# Altium PCB filtro_rev4.PcbDoc
Units mil, origin at the board's own origin, x right, y up, seen from the top; angles counter-clockwise.
Board outline 3939.96 x 3929 mil, 2 copper layers (Top Layer, Bottom Layer); 21 components, 15 nets, 76 pads, 513 vias.
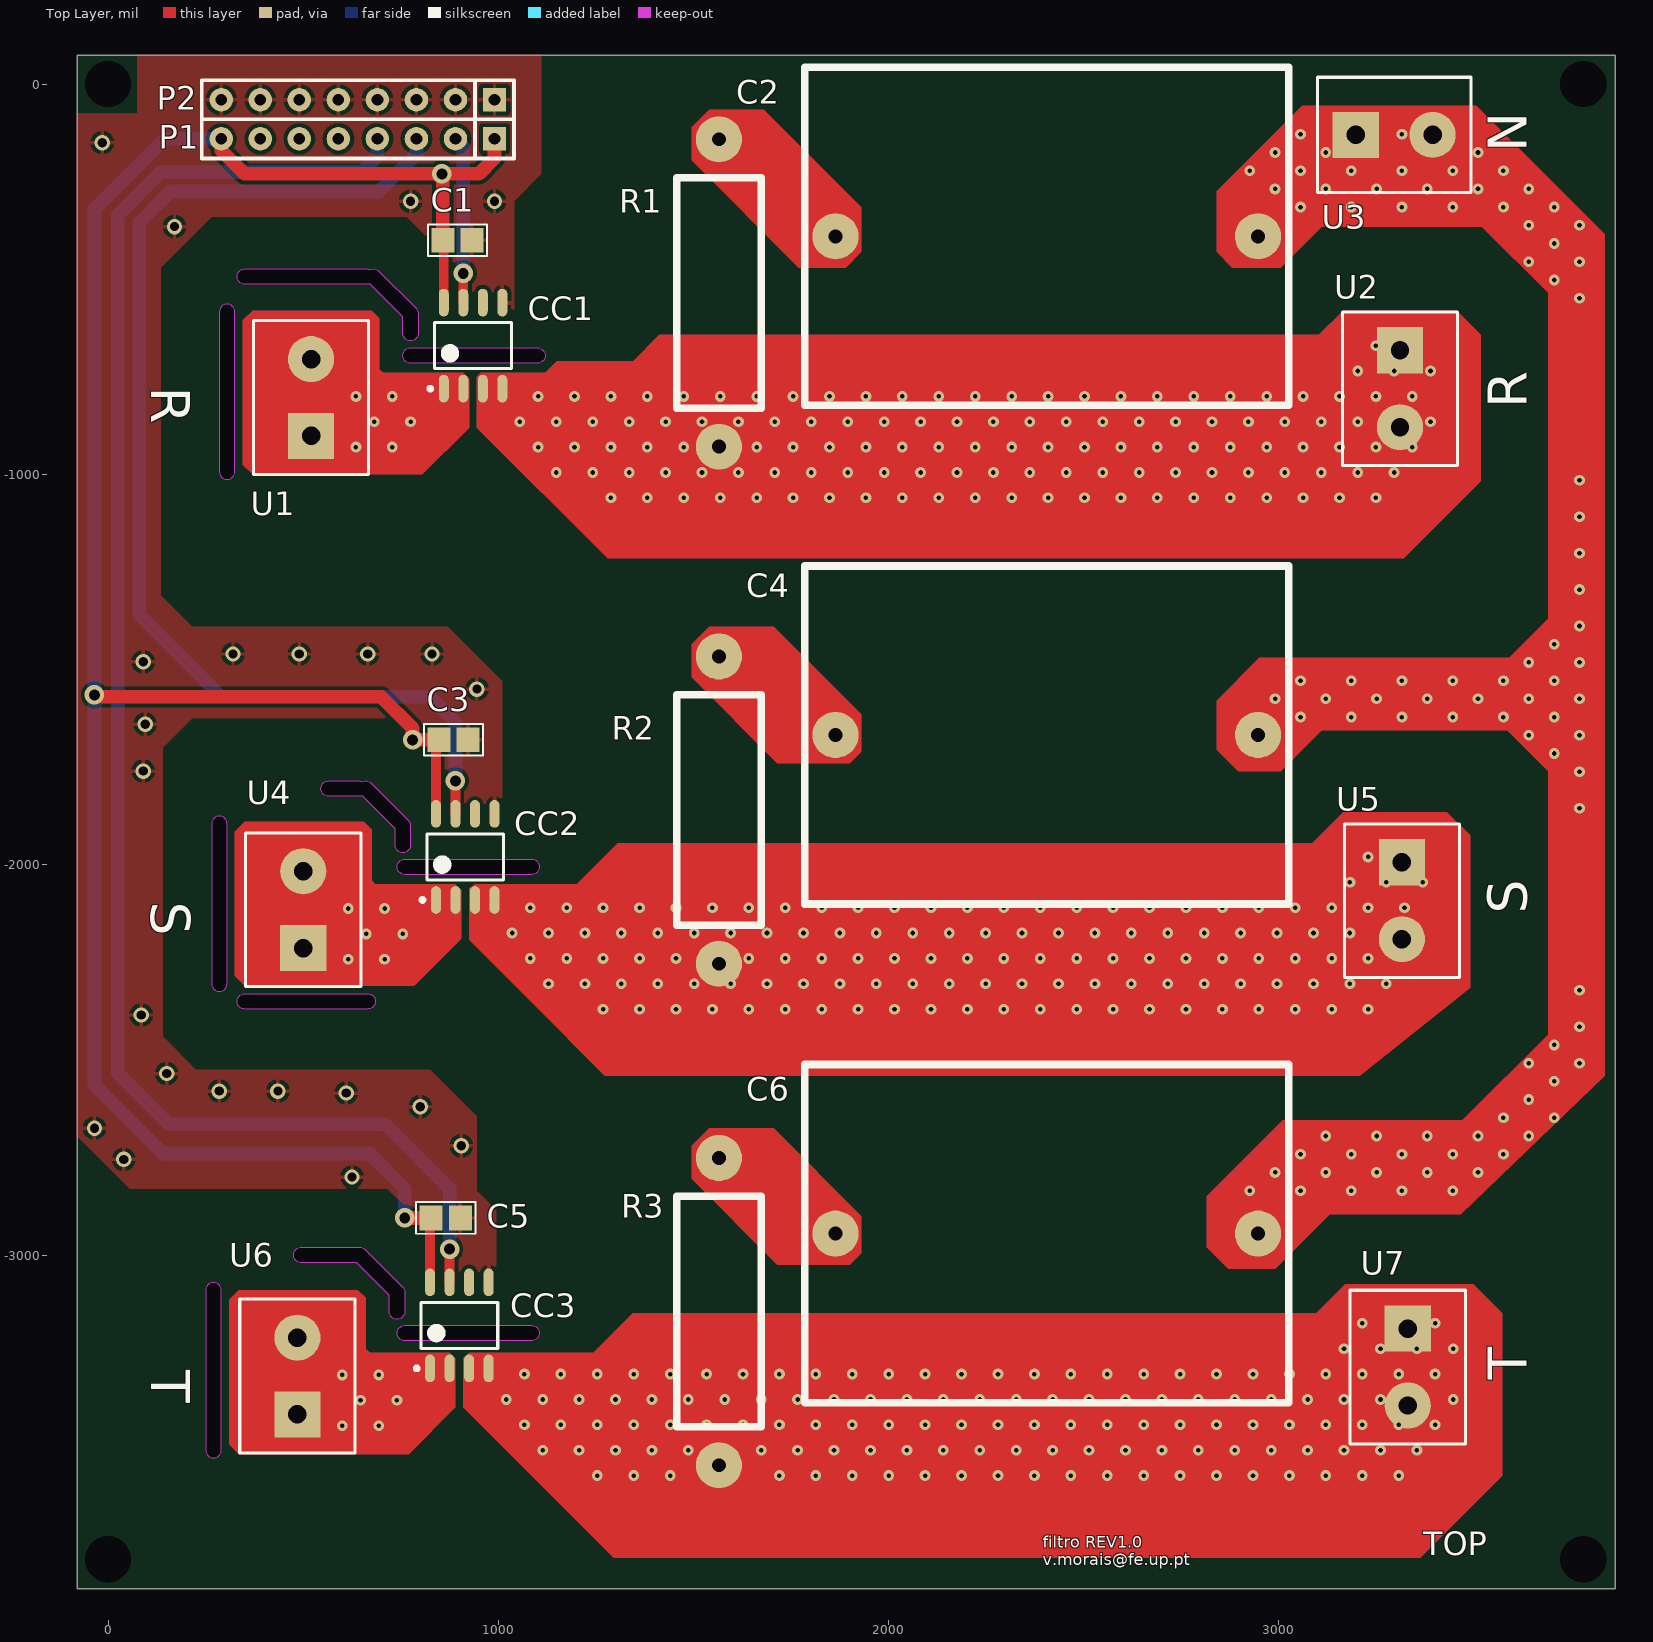
[diagram p0: Top Layer view]
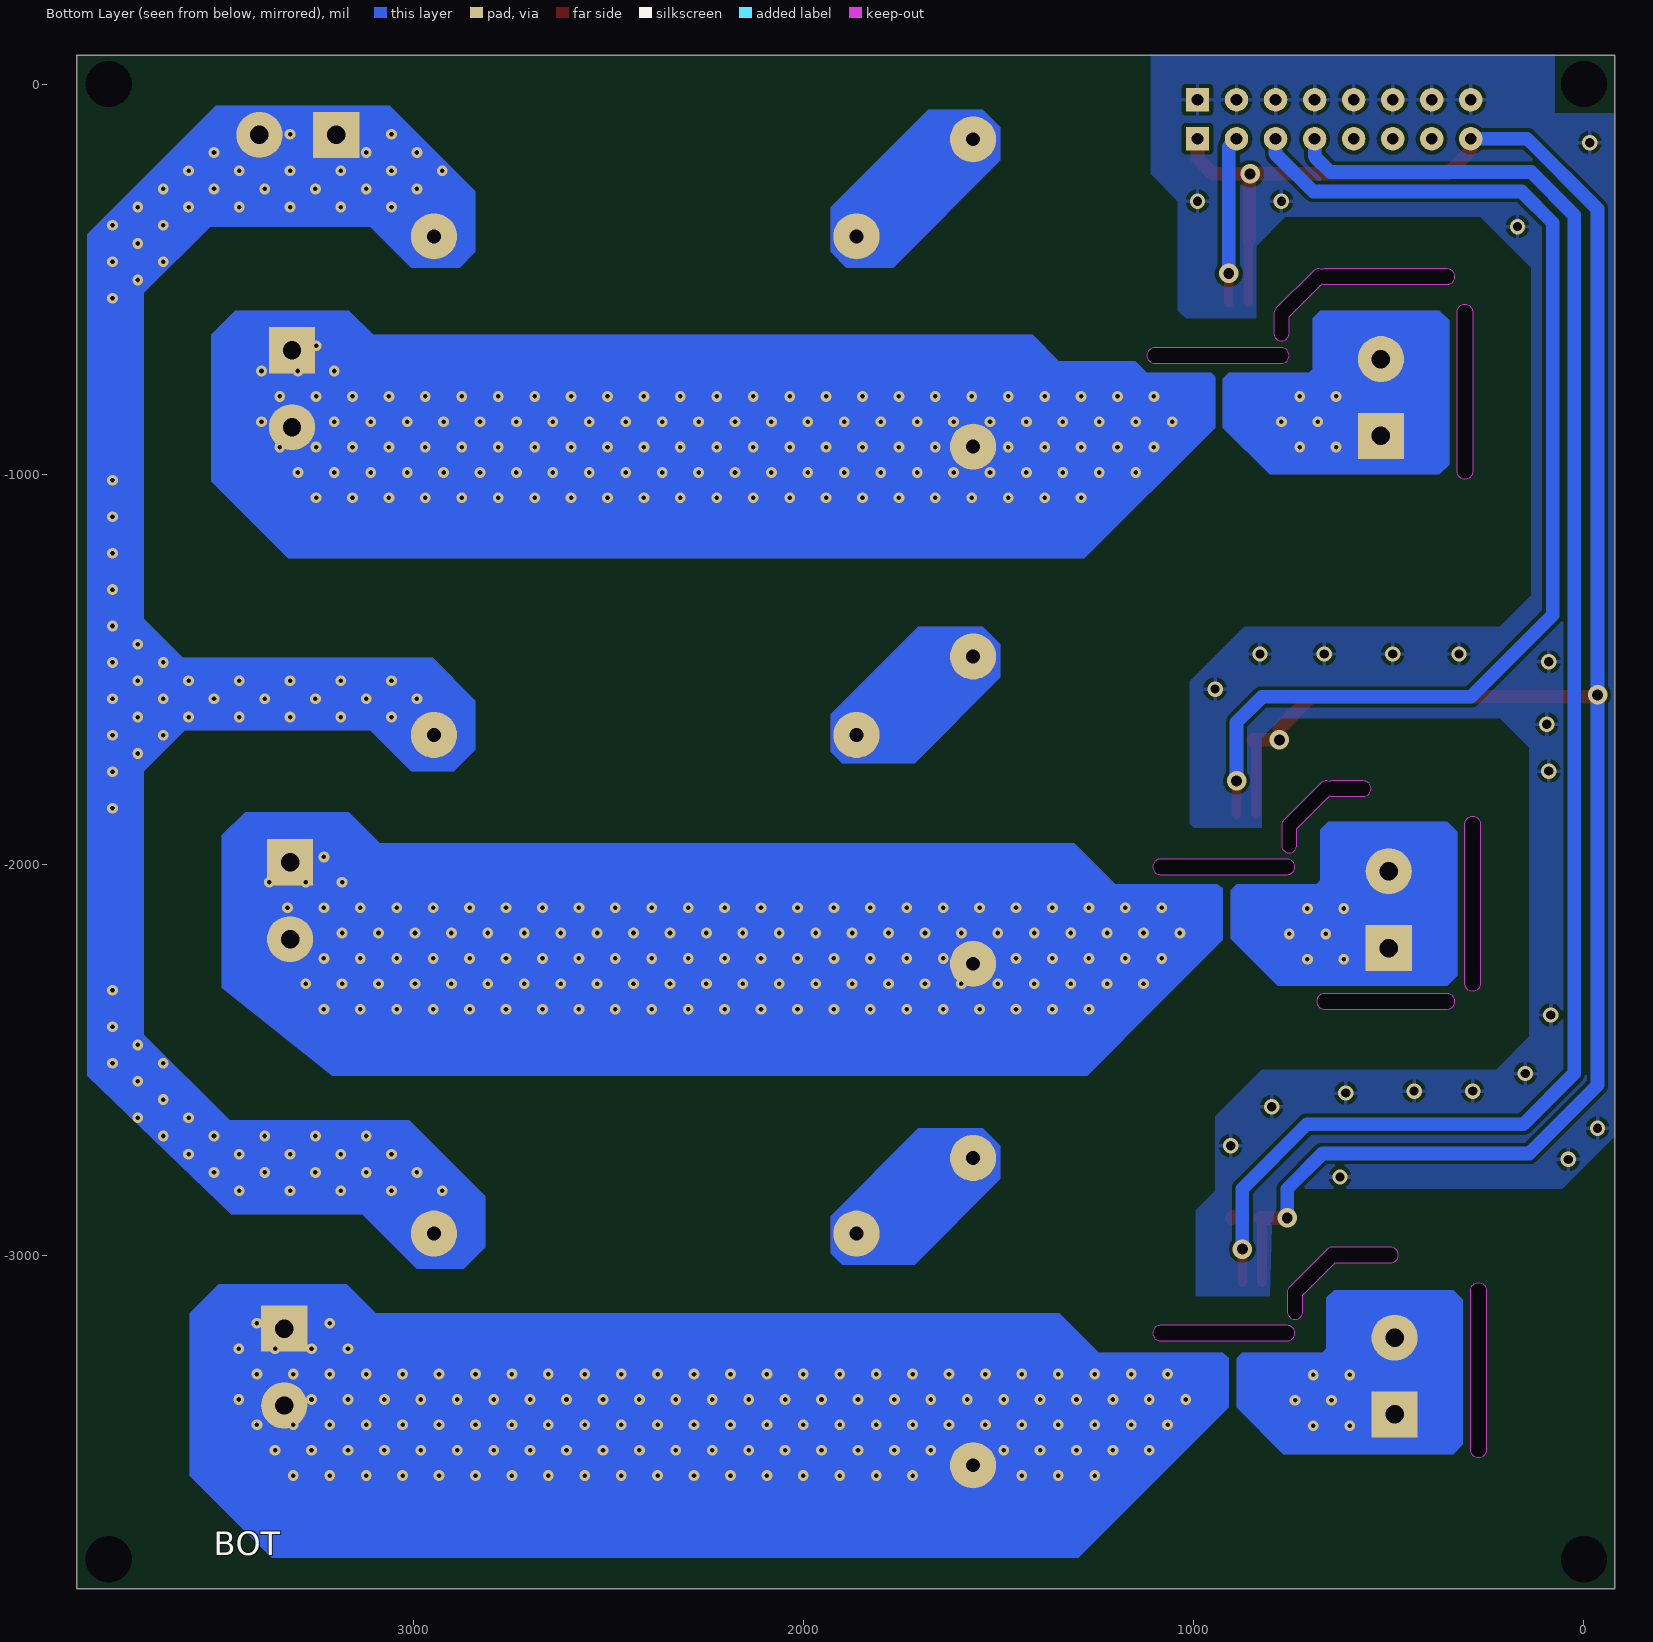
[diagram p1: Bottom Layer view, seen from below]

## Layer stack, top to bottom
Top Solder: solder mask 0.4, Solder Resist, Dk 3.5
Top Layer: signal copper 1.4
Dielectric 1: dielectric 12.6, FR-4, Dk 4.8
Bottom Layer: signal copper 1.4
Bottom Solder: solder mask 0.4, Solder Resist, Dk 3.5

## Board outline
-78.74,-3854.53 3861.22,-3854.53 3861.22,74.47 -78.74,74.47
cut-out: 495,-3019.7 cw(c495,-3000) 495,-2980.3 645,-2980.3 cw(c645,-3000) 658.93,-2986.07 658.92,-2986.06 cw(c645,-3000) 658.94,-2986.08 658.92,-2986.06 753.94,-3081.08 ccw(c740,-3095) 753.92,-3081.06 753.93,-3081.07 cw(c740,-3095) 759.7,-3095 759.7,-3145 cw(c740,-3145) 720.3,-3145 720.3,-3103.16 636.84,-3019.7
cut-out: 350,-2369.7 cw(c350,-2350) 350,-2330.3 665,-2330.3 cw(c665,-2350) 684.7,-2350 cw(c665,-2350) 665,-2369.7
cut-out: 565,-1824.7 cw(c565,-1805) 565,-1785.3 645,-1785.3 cw(c645,-1805) 652.5,-1786.78 cw(c660,-1805) 673.93,-1791.07 768.94,-1886.08 ccw(c755,-1900) 768.92,-1886.06 768.93,-1886.07 cw(c755,-1900) 774.7,-1900 774.7,-1950 cw(c755,-1950) 735.3,-1950 735.3,-1908.16 650.93,-1823.79 cw(c645,-1805) 645,-1824.7
cut-out: 350,-512.85 cw(c350,-493.15) 350,-473.45 665,-473.45 cw(c665,-493.15) 672.5,-474.93 cw(c680,-493.15) 693.93,-479.22 788.94,-574.23 ccw(c775,-588.15) 788.92,-574.21 788.93,-574.22 cw(c775,-588.15) 794.7,-588.15 794.7,-638.15 cw(c775,-638.15) 755.3,-638.15 755.3,-596.31 670.93,-511.94 cw(c665,-493.15) 665,-512.85
cut-out: 250.3,-3500 ccw(c270,-3500) 289.7,-3500 289.7,-3090 ccw(c270,-3090) 250.3,-3090
cut-out: 285.3,-993.15 ccw(c305,-993.15) 324.7,-993.15 324.7,-583.15 ccw(c305,-583.15) 285.3,-583.15
cut-out: 265.3,-2305 ccw(c285,-2305) 304.7,-2305 304.7,-1895 ccw(c285,-1895) 265.3,-1895
cut-out: 775,-715 cw(c775,-695.3) 775,-675.6 1100,-675.6 cw(c1100,-695.3) 1119.7,-695.3 cw(c1100,-695.3) 1100,-715
cut-out: 760,-2025 cw(c760,-2005.3) 760,-1985.6 1085,-1985.6 cw(c1085,-2005.3) 1104.7,-2005.3 cw(c1085,-2005.3) 1085,-2025
cut-out: 760,-3219.7 cw(c760,-3200) 760,-3180.3 1085,-3180.3 cw(c1085,-3200) 1104.7,-3200 cw(c1085,-3200) 1085,-3219.7

## Design rules (kind name [scope] priority, off if disabled: settings)
Clearance [All] p1: gap=10 ignorepadtopadclearanceinfootprint=FALSE
Height [All] p1: minheight=0 maxheight=10000 prefheight=500
HoleSize [All] p1: absolutevalues=TRUE maxlimit=1000 minlimit=1 maxpercent=80.000 minpercent=20.000
PlaneClearance [All] p1: clearance=100
PolygonConnect [All] p1: connectstyle=Relief reliefconductorwidth=10 reliefentries=4 polygonreliefangle="90 Angle" airgapwidth=10
RoutingVias [All] p1: holewidth=28 width=50 viastyle="Through Hole" minholewidth=28 minwidth=50 maxholewidth=28 maxwidth=50
SilkToSilkClearance [All] p1: silktosilkclearance=1
SilkToSolderMaskClearance [IsPad] p1: minsilkscreentomaskgap=1 clearancetoexposedcopper=TRUE
SolderMaskExpansion [All] p1: expansion=4
Width [All] p1: maxlimit=150 minlimit=10 preferedwidth=30
25 further rules are at their usual default settings.

## Components (designator, comment, footprint, x,y, rotation, side; value= is the part's Value field where it differs from the comment)
C1 "C 10uF 0805 MLCC 25V X5R" CAPC_0805 895,-400 r180 top
C2 "C 8uF PPCap TH 900V" PWR_CAP_PP_8u 2405,-390 r180 top
C3 "C 10uF 0805 MLCC 25V X5R" CAPC_0805 885,-1680 r180 top
C4 "C 2uF PPCap TH 630V" PWR_CAP_PP_8u 2405,-1667.5 r180 top
C5 "C 10uF 0805 MLCC 25V X5R" CAPC_0805 865,-2905 r180 top
C6 "C 2uF PPCap TH 630V" PWR_CAP_PP_8u 2405,-2945 r180 top
CC1 "IC CC 30A SO-8" CC6303_SOP8 935,-670 r90 top
CC2 "IC CC 30A SO-8" CC6303_SOP8 915,-1980 r90 top
CC3 "IC CC 30A SO-8" CC6303_SOP8 900,-3180.24 r90 top
P1 "P 8p 2.54 SR DW 8P" "Header 8x1 8.5mm" 990,-140 r180 top
P2 "P 8p 2.54 SR DW 8P" "Header 8x1 8.5mm" 990,-40 r180 top
R1 "R 2.2 3W TH 5%" PWR_RESC_3W 1565,-535 r270 top
R2 "R 2.2 3W TH 5%" PWR_RESC_3W 1565,-1860 r270 top
R3 "R 2.2 3W TH 5%" PWR_RESC_3W 1565,-3145 r270 top
U1 "P 2p 5mm" connector1x2_parafuso 520,-802.87 r90 top
U2 "P 2p 5mm" connector1x2_parafuso 3310,-780.28 r270 top
U3 "P 2p 5mm" connector1x2_parafuso 3295,-130 r0 top
U4 "P 2p 5mm" connector1x2_parafuso 500,-2115 r90 top
U5 "P 2p 5mm" connector1x2_parafuso 3315,-2092.13 r270 top
U6 "P 2p 5mm" connector1x2_parafuso 485,-3310 r90 top
U7 "P 2p 5mm" connector1x2_parafuso 3330,-3287.13 r270 top

## Footprints (in the part's own frame and the unit in brackets; to place one, negate y for a bottom-side part, rotate by r counter-clockwise, add the part's x,y. Pads: shape width x height; smd on the part's side, far side on the other; paste and mask are expansions set on the pad)
CAPC_0805 [mm] "Chip Capacitor, Body 2.0x1.3mm, IPC Low Density"
  rect 1.5x1.6 smd: 1(-0.95,0) 2(0.95,0)
  silkscreen extent -1.93,-1.03 1.93,1.03, body extent -1.1,-0.72 1.1,0.72, height 1.1
CC6303_SOP8 [mm] "SOP, 8-Leads, Body 4,90x3,91mm, Pitch 1,27mm, IPC Medium Density"
  oval 1.8x0.65 smd: 1(-2.8,1.905) 2(-2.8,0.635) 3(-2.8,-0.635) 4(-2.8,-1.905) 5(2.8,-1.905) 6(2.8,-0.635) 7(2.8,0.635) 8(2.8,1.905)
  silkscreen extent -2.92,-2.5 1.5,2.9, body extent -1.9,-2.5 1.9,2.5, height 2.65
connector1x2_parafuso [mm] "Connector; Header; 2 Position"
  rect 3x3 hole 1.2: 1(-2.5,0)
  round 3 hole 1.2: 2(2.5,0)
  silkscreen extent -5,-3.75 5,3.75, body extent -4.92,-4.53 5.68,4.47, height 14.6
"Header 8x1 8.5mm" [mil] "Stackable 8 pin header"
  rect 60x60 hole 30: 1(0,0)
  round 60 hole 30: 2(100,0) 3(200,0) 4(300,0) 5(400,0) 6(500,0) 7(600,0) 8(700,0)
  silkscreen extent -50,-50 750,50, body extent -50,-50 750,50, height 335
PWR_CAP_PP_8u [mm] "8uCAP"
  round 3 hole 0.9: 1(-13.75,0) 2(13.75,0)
  silkscreen extent -15.75,-11 15.75,11, body extent -15.73,-10.97 15.74,10.97, height 37
PWR_RESC_3W [mm] "RESC_3W"
  round 3 hole 0.9: 1(-10,0) 2(10,0)
  silkscreen extent -7.5,-2.75 7.5,2.75, body extent -10.79,-2.57 10.8,2.93, height 13.75

## Part data
C1 C3 C5: library part "Capacitor SMD", "Capacitores de cerâmica multicamada MLCC - SMD/SMT 10uF 25V X5R +/-10% 0805 Gen Purp", LCSC PART #=C15850, Mouser VPN=963-TMK212BBJ106KG-T, Price=0,162
C2: library part CAPACITOR_dcbus, "Condensador de polipropileno PP KEMET, 8µF, ±5%, 900V dc, Montaje en orificio pasante", Price=4,83, RS VPN=137-2363
C4 C6: library part CAPACITOR_dcbus, "Capacitores de película 2.0uF 630volts 10% 37.5mmL/S 1.0mmL/D", Mouser VPN=871-B32676E6205K, Price=3,62
CC1 CC2 CC3: library part Current_Sensor_cc6303, "Sensores de Corrente de Montagem de Painel Hall Effect IC LF 30A 66 mV/A", LCSC PART #=C10681, Mouser VPN=630-ACHS-7123-000E, Price=3,47
P1 P2: library part jumper_8p, "Distribuidores e Alojamento de Fios CGrid Hrd SRDW THo le 8ckt", Mouser VPN=538-87937-0800, Price=0,621
R1 R2 R3: library part Resistor, "Resistencia TE Connectivity, de 2.2O ±5%, 3W, Serie ROX3S", Price=0,351, RS VPN=214-2409
U1 U2 U3 U4 U5 U6 U7: library part gen_purpose_conn_1x2, "Bloques de terminales de PCB de perfil estándar RS de 5,0 mm", Price=0,24, RS VPN=896-6696

## Free pads (board coordinates)
  round 60 hole 118.11 unplated: 4(0,-3779.53) 4(0,0) 4(3779.53,0) 4(3779.53,-3779.53)

## Via types
v1: diameter 27.56, hole 11.81, Top Layer to Bottom Layer, 484 vias
v2: diameter 39.37, hole 23.62, Top Layer to Bottom Layer, 22 vias
v3: diameter 50, hole 28, Top Layer to Bottom Layer, 7 vias

## Nets (pads, with @x,y where several pads share a name; then routed paths per layer and width w, separated by ;. In a path a pad name is that pad's centre, name@x,y a point inside that pad or via, vN(x,y) a via of type N, cw(c..) or ccw(c..) an arc to the next point about the centre after c; other vN are vias at no path point)
5gnd1: C1.1 C3.1 C5.1 CC1.5 CC2.5 CC3.5 P2.1 P2.2 P2.3 P2.4 P2.5 P2.6 P2.7 P2.8 | length 3.4
  Top Layer w35: C5.1@900,-2902.6 C5.1
  other v2: 625,-2800 40,-2755 905,-2720 -35,-2675 800,-2620 610,-2585 285,-2580 435,-2580 150,-2535 85,-2385 90,-1760 95,-1640 945,-1550 90,-1480 320,-1460 490,-1460 665,-1460 830,-1460 170,-365 775,-300 990,-300 -15,-150
5VDC1: C1.2 C3.2 C5.2 CC1.8 CC2.8 CC3.8 P1.1 P1.8 | length 6149.8
  Top Layer w25: CC3.8 825,-2907.6 C5.2 ; C3.2@837.6,-1680 840,-1682.4 CC2.8 ; C1.2 860,-402.4 CC1.8
  Top Layer w35: v3(-35,-1565) -30,-1570 700,-1570 780,-1650 v3(780,-1680) C3.2 ; P1.8 290,-170 350,-230 v3(855,-230) ; v3(760,-2905) C5.2 ; C1.2 857.6,-232.6 v3(855,-230) ; P1.1 990,-190 950,-230 v3(855,-230)
  Bottom Layer w35: P1.8 145,-140 -35,-320 v3(-35,-1565) -35,-2565 140,-2740 670,-2740 760,-2830 v3(760,-2905)
GRID_N: C2.1 C4.1 C6.1 U3.1 U3.2
  other v1: 2925,-2835 3055,-2835 3185,-2835 3315,-2835 3445,-2835 2990,-2788.33 3120,-2788.33 3250,-2788.33 3380,-2788.33 3510,-2788.33 3055,-2741.66 3185,-2741.66 3315,-2741.66 3445,-2741.66 3575,-2741.66 3120,-2695 3250,-2695 3380,-2695 3510,-2695 3640,-2695 3575,-2648.33 3705,-2648.33 3640,-2601.66 3705,-2555 3640,-2508.33 3770,-2508.33 3705,-2461.66 3770,-2415 3770,-2321.66 3770,-1855 3770,-1761.66 3705,-1715 3640,-1668.33 3770,-1668.33 3055,-1621.66 3185,-1621.66 3315,-1621.66 3445,-1621.66 3575,-1621.66 3705,-1621.66 2990,-1575 3120,-1575 3250,-1575 3380,-1575 3510,-1575 3640,-1575 3770,-1575 3055,-1528.33 3185,-1528.33 3315,-1528.33 3445,-1528.33 3575,-1528.33 3705,-1528.33 3640,-1481.67 3770,-1481.67 3705,-1435 3770,-1388.33 3770,-1295 3770,-1201.67 3770,-1108.33 3770,-1015 3770,-548.33 3705,-501.67 3640,-455 3770,-455 3705,-408.33 3640,-361.67 3770,-361.67 3055,-315 3185,-315 3315,-315 3445,-315 3575,-315 3705,-315 2990,-268.33 3120,-268.33 3250,-268.33 3380,-268.33 3510,-268.33 3640,-268.33 2925,-221.67 3055,-221.67 3185,-221.67 3315,-221.67 3445,-221.67 3575,-221.67 2990,-175 3120,-175 3510,-175 3055,-128.33 3315,-128.33
I_U: CC1.7 P1.2 | length 428
  Top Layer w25: CC1.7 v3(910,-485)
  Bottom Layer w35: P1.2 910,-160 v3(910,-485)
I_V: CC2.7 P1.3 | length 2985.4
  Top Layer w25: CC2.7 v3(890,-1785)
  Bottom Layer w35: P1.3 790,-178.64 693.64,-275 160,-275 80,-355 80,-1360 290,-1570 825,-1570 890,-1635 v3(890,-1785)
I_W: CC3.7 P1.4 | length 4184.4
  Top Layer w25: CC3.7 v3(875,-2985)
  Bottom Layer w35: P1.4 690,-185 650,-225 135,-225 25,-335 25,-2535 155,-2665 710,-2665 875.1,-2830.1 875.1,-2984.9 v3(875,-2985)
INDUCTOR_Ph_A: CC1.1 CC1.2 U1.1 U1.2
  other v1: 635,-930 728.33,-930 681.67,-865 775,-865 635,-800 728.33,-800
INDUCTOR_Ph_B: CC2.1 CC2.2 U4.1 U4.2
  other v1: 615,-2242.13 708.33,-2242.13 661.67,-2177.13 755,-2177.13 615,-2112.13 708.33,-2112.13
INDUCTOR_Ph_C: CC3.1 CC3.2 U6.1 U6.2
  other v1: 600,-3437.13 693.33,-3437.13 646.67,-3372.13 740,-3372.13 600,-3307.13 693.33,-3307.13
NetC2_2: C2.2 R1.1
NetC4_2: C4.2 R2.1
NetC6_2: C6.2 R3.1
NetCC1_3: CC1.3 CC1.4 R1.2 U2.1 U2.2
  other v1: 1288.33,-1060 1381.67,-1060 1475,-1060 1568.33,-1060 1661.67,-1060 1755,-1060 1848.33,-1060 1941.67,-1060 2035,-1060 2128.33,-1060 2221.66,-1060 2315,-1060 2408.33,-1060 2501.66,-1060 2595,-1060 2688.33,-1060 2781.66,-1060 2875,-1060 2968.33,-1060 3061.66,-1060 3155,-1060 3248.33,-1060 1148.33,-995 1241.67,-995 1335,-995 1428.33,-995 1521.67,-995 1615,-995 1708.33,-995 1801.67,-995 1895,-995 1988.33,-995 2081.67,-995 2175,-995 2268.33,-995 2361.66,-995 2455,-995 2548.33,-995 2641.66,-995 2735,-995 2828.33,-995 2921.66,-995 3015,-995 3108.33,-995 3201.66,-995 3295,-995 1101.67,-930 1195,-930 1288.33,-930 1381.67,-930 1475,-930 1661.67,-930 1755,-930 1848.33,-930 1941.67,-930 2035,-930 2128.33,-930 2221.66,-930 2315,-930 2408.33,-930 2501.66,-930 2595,-930 2688.33,-930 2781.66,-930 2875,-930 2968.33,-930 3061.66,-930 3155,-930 3248.33,-930 3341.66,-930 1055,-865 1148.33,-865 1241.67,-865 1335,-865 1428.33,-865 1521.67,-865 1615,-865 1708.33,-865 1801.67,-865 1895,-865 1988.33,-865 2081.67,-865 2175,-865 2268.33,-865 2361.66,-865 2455,-865 2548.33,-865 2641.66,-865 2735,-865 2828.33,-865 2921.66,-865 3015,-865 3108.33,-865 3201.66,-865 3388.33,-865 1101.67,-800 1195,-800 1288.33,-800 1381.67,-800 1475,-800 1568.33,-800 1661.67,-800 1755,-800 1848.33,-800 1941.67,-800 2035,-800 2128.33,-800 2221.66,-800 2315,-800 2408.33,-800 2501.66,-800 2595,-800 2688.33,-800 2781.66,-800 2875,-800 2968.33,-800 3061.66,-800 3155,-800 3248.33,-800 3341.66,-800 3201.66,-735 3295,-735 3388.33,-735 3248.33,-670
NetCC2_3: CC2.3 CC2.4 R2.2 U5.1 U5.2
  other v1: 1268.33,-2370 1361.67,-2370 1455,-2370 1548.33,-2370 1641.67,-2370 1735,-2370 1828.33,-2370 1921.67,-2370 2015,-2370 2108.33,-2370 2201.66,-2370 2295,-2370 2388.33,-2370 2481.66,-2370 2575,-2370 2668.33,-2370 2761.66,-2370 2855,-2370 2948.33,-2370 3041.66,-2370 3135,-2370 3228.33,-2370 1128.33,-2305 1221.67,-2305 1315,-2305 1408.33,-2305 1501.67,-2305 1595,-2305 1688.33,-2305 1781.67,-2305 1875,-2305 1968.33,-2305 2061.67,-2305 2155,-2305 2248.33,-2305 2341.66,-2305 2435,-2305 2528.33,-2305 2621.66,-2305 2715,-2305 2808.33,-2305 2901.66,-2305 2995,-2305 3088.33,-2305 3181.66,-2305 3275,-2305 1081.67,-2240 1175,-2240 1268.33,-2240 1361.67,-2240 1455,-2240 1641.67,-2240 1735,-2240 1828.33,-2240 1921.67,-2240 2015,-2240 2108.33,-2240 2201.66,-2240 2295,-2240 2388.33,-2240 2481.66,-2240 2575,-2240 2668.33,-2240 2761.66,-2240 2855,-2240 2948.33,-2240 3041.66,-2240 3135,-2240 3228.33,-2240 1035,-2175 1128.33,-2175 1221.67,-2175 1315,-2175 1408.33,-2175 1501.67,-2175 1595,-2175 1688.33,-2175 1781.67,-2175 1875,-2175 1968.33,-2175 2061.67,-2175 2155,-2175 2248.33,-2175 2341.66,-2175 2435,-2175 2528.33,-2175 2621.66,-2175 2715,-2175 2808.33,-2175 2901.66,-2175 2995,-2175 3088.33,-2175 3181.66,-2175 1081.67,-2110 1175,-2110 1268.33,-2110 1361.67,-2110 1455,-2110 1548.33,-2110 1641.67,-2110 1735,-2110 1828.33,-2110 1921.67,-2110 2015,-2110 2108.33,-2110 2201.66,-2110 2295,-2110 2388.33,-2110 2481.66,-2110 2575,-2110 2668.33,-2110 2761.66,-2110 2855,-2110 2948.33,-2110 3041.66,-2110 3135,-2110 3228.33,-2110 3321.66,-2110 3181.66,-2045 3275,-2045 3368.33,-2045 3228.33,-1980
NetCC3_3: CC3.3 CC3.4 R3.2 U7.1 U7.2
  other v1: 1253.33,-3565 1346.67,-3565 1440,-3565 1720,-3565 1813.33,-3565 1906.67,-3565 2000,-3565 2093.33,-3565 2186.66,-3565 2280,-3565 2373.33,-3565 2466.66,-3565 2560,-3565 2653.33,-3565 2746.66,-3565 2840,-3565 2933.33,-3565 3026.66,-3565 3120,-3565 3213.33,-3565 3306.66,-3565 1113.33,-3500 1206.67,-3500 1300,-3500 1393.33,-3500 1486.67,-3500 1673.33,-3500 1766.67,-3500 1860,-3500 1953.33,-3500 2046.67,-3500 2140,-3500 2233.33,-3500 2326.66,-3500 2420,-3500 2513.33,-3500 2606.66,-3500 2700,-3500 2793.33,-3500 2886.66,-3500 2980,-3500 3073.33,-3500 3166.66,-3500 3260,-3500 3353.33,-3500 1066.67,-3435 1160,-3435 1253.33,-3435 1346.67,-3435 1440,-3435 1533.33,-3435 1626.67,-3435 1720,-3435 1813.33,-3435 1906.67,-3435 2000,-3435 2093.33,-3435 2186.66,-3435 2280,-3435 2373.33,-3435 2466.66,-3435 2560,-3435 2653.33,-3435 2746.66,-3435 2840,-3435 2933.33,-3435 3026.66,-3435 3120,-3435 3213.33,-3435 3306.66,-3435 3400,-3435 1020,-3370 1113.33,-3370 1206.67,-3370 1300,-3370 1393.33,-3370 1486.67,-3370 1580,-3370 1673.33,-3370 1766.67,-3370 1860,-3370 1953.33,-3370 2046.67,-3370 2140,-3370 2233.33,-3370 2326.66,-3370 2420,-3370 2513.33,-3370 2606.66,-3370 2700,-3370 2793.33,-3370 2886.66,-3370 2980,-3370 3073.33,-3370 3166.66,-3370 3260,-3370 3446.66,-3370 1066.67,-3305 1160,-3305 1253.33,-3305 1346.67,-3305 1440,-3305 1533.33,-3305 1626.67,-3305 1720,-3305 1813.33,-3305 1906.67,-3305 2000,-3305 2093.33,-3305 2186.66,-3305 2280,-3305 2373.33,-3305 2466.66,-3305 2560,-3305 2653.33,-3305 2746.66,-3305 2840,-3305 2933.33,-3305 3026.66,-3305 3120,-3305 3213.33,-3305 3306.66,-3305 3400,-3305 3166.66,-3240 3260,-3240 3353.33,-3240 3446.66,-3240 3213.33,-3175 3400,-3175
pads on no net: CC1.6 CC2.6 CC3.6 P1.5 P1.6 P1.7

## Polygon pours and split planes (outlines as drawn)
5gnd1 on Bottom Layer "Top Layer-No Net 1" (solid, pour order 0): 805,-3105 995,-3105 995,-2885 945,-2835 945,-2645 825,-2525 225,-2525 140,-2440 140,-1700 215,-1625 775,-1625 825,-1675 825,-1905 1000,-1905 1010,-1895 1010,-1530 870,-1390 215,-1390 135,-1310 135,-470 265,-340 765,-340 840,-415 840,-600 1020,-600 1040,-580 1040,-300 1110,-230 1110,75 75,75 75,-75 -80,-75 -80,-2700 -75,-2700 55,-2830 715,-2830 805,-2920 800,-2920
5gnd1 on Top Layer "Top Layer-No Net 1" (solid, pour order 2): 805,-3105 995,-3105 995,-2885 945,-2835 945,-2645 825,-2525 225,-2525 140,-2440 140,-1700 215,-1625 775,-1625 825,-1675 825,-1905 1000,-1905 1010,-1895 1010,-1530 870,-1390 215,-1390 135,-1310 135,-470 265,-340 765,-340 840,-415 840,-600 1020,-600 1040,-580 1040,-300 1110,-230 1110,75 75,75 75,-75 -80,-75 -80,-2700 -75,-2700 55,-2830 715,-2830 805,-2920 800,-2920

## Other copper
Top Layer:
  region net INDUCTOR_Ph_C: 335,-3090 310,-3115 310,-3485 335,-3510 770,-3510 890,-3390 890,-3265 875,-3250 670,-3250 660,-3240 660,-3110 640,-3090
  region net NetC6_2: 1550,-2675 1540,-2675 1495,-2720 1495,-2805 1715,-3025 1900,-3025 1930,-2995 1930,-2900 1705,-2675
  region net NetC4_2: 1550,-1390 1540,-1390 1495,-1435 1495,-1520 1715,-1740 1900,-1740 1930,-1710 1930,-1615 1705,-1390
  region net NetCC1_3: 3320,-1215 3517.5,-1017.5 3517.5,-642.5 3455,-580 3165,-580 3102.5,-642.5 1412.5,-642.5 1345,-710 1150,-710 1120,-740 955,-740 945,-750 945,-880 1280,-1215
  region net NetCC2_3: 3490,-1925 3490,-2315 3207.44,-2540 1272.5,-2540 1082.5,-2350 925,-2192.5 925,-2060 940,-2050 1200.83,-2050 1305.83,-1945 3085,-1945 3165,-1865 3430,-1865
  region net NetCC3_3: 3572.1,-3149.26 3497.83,-3075 3169.27,-3075 3095,-3149.26 1344.26,-3149.26 1245,-3248.53 925,-3250 910,-3265 910,-3390 1295,-3775 3362.5,-3775 3572.1,-3565.4
  region net GRID_N: 2880,-470 3005,-470 3110,-365 3520,-365 3690,-535 3690,-1370 3590,-1470 2950,-1470 2840,-1580 2840,-1705 2895,-1760 3005,-1760 3110,-1655 3585,-1655 3690,-1760 3690,-2435 3470,-2655 3010,-2655 2815,-2850 2815,-2980 2870,-3035 2990,-3035 3130,-2895 3466.04,-2895 3835,-2540.8 3835,-385 3505,-55 3060,-55 2840,-275 2840,-430
  region net NetC2_2: 1550,-65 1540,-65 1495,-110 1495,-195 1770,-470 1890,-470 1930,-430 1930,-315 1680,-65
  region net INDUCTOR_Ph_A: 370,-580 345,-605 345,-975 370,-1000 805,-1000 925,-880 925,-755 910,-740 705,-740 695,-730 695,-600 675,-580
  region net INDUCTOR_Ph_B: 350,-1890 325,-1915 325,-2285 350,-2310 785,-2310 905,-2190 905,-2065 890,-2050 685,-2050 675,-2040 675,-1910 655,-1890
Bottom Layer:
  region net NetCC1_3: 3320,-1215 3517.5,-1017.5 3517.5,-642.5 3455,-580 3165,-580 3102.5,-642.5 1412.5,-642.5 1345,-710 1150,-710 1120,-740 955,-740 945,-750 945,-880 1280,-1215
  region net NetCC2_3: 3490,-1925 3490,-2315 3207.44,-2540 1272.5,-2540 1082.5,-2350 925,-2192.5 925,-2060 940,-2050 1200.83,-2050 1305.83,-1945 3085,-1945 3165,-1865 3430,-1865
  region net NetCC3_3: 3572.1,-3149.26 3497.83,-3075 3169.27,-3075 3095,-3149.26 1344.26,-3149.26 1243.53,-3250 925,-3250 910,-3265 910,-3390 1295,-3775 3362.5,-3775 3572.1,-3565.4
  region net GRID_N: 2880,-470 3005,-470 3110,-365 3520,-365 3690,-535 3690,-1370 3590,-1470 2950,-1470 2840,-1580 2840,-1705 2895,-1760 3005,-1760 3110,-1655 3585,-1655 3690,-1760 3690,-2435 3470,-2655 3010,-2655 2815,-2850 2815,-2980 2870,-3035 2990,-3035 3130,-2895 3466.04,-2895 3835,-2540.8 3835,-385 3505,-55 3060,-55 2840,-275 2840,-430
  region net NetC2_2: 1550,-65 1540,-65 1495,-110 1495,-195 1770,-470 1890,-470 1930,-430 1930,-315 1680,-65
  region net NetC4_2: 1550,-1390 1540,-1390 1495,-1435 1495,-1520 1715,-1740 1900,-1740 1930,-1710 1930,-1615 1705,-1390
  region net NetC6_2: 1550,-2675 1540,-2675 1495,-2720 1495,-2805 1715,-3025 1900,-3025 1930,-2995 1930,-2900 1705,-2675
  region net INDUCTOR_Ph_A: 370,-580 345,-605 345,-975 370,-1000 805,-1000 925,-880 925,-755 910,-740 705,-740 695,-730 695,-600 675,-580
  region net INDUCTOR_Ph_C: 335,-3090 310,-3115 310,-3485 335,-3510 770,-3510 890,-3390 890,-3265 875,-3250 670,-3250 660,-3240 660,-3110 640,-3090
  region net INDUCTOR_Ph_B: 350,-1890 325,-1915 325,-2285 350,-2310 785,-2310 905,-2190 905,-2065 890,-2050 685,-2050 675,-2040 675,-1910 655,-1890

## Silkscreen, mask and mechanical layers (free items; w line width, h text height)
Top Overlay:
  text "N" at 3635,-175 h100 r90
  text "R" at 110,-775 h100 r270
  text "R" at 3635,-830 h100 r90
  text "S" at 110,-2095 h100 r270
  text "S" at 3635,-2125 h100 r90
  text "T" at 110,-3295 h100 r270
  text "T" at 3635,-3320 h100 r90
  text "TOP" at 3370,-3769.53 h60
  text "filtro REV1.0 / v.morais@fe.up.pt" at 2395,-3795 h30
Bottom Overlay:
  text "BOT" at 3510,-3769.53 h60
Bottom Solder:
  region: 3465,-3165 3410,-3110 3235,-3110 3079.56,-3265.44 1290,-3265.44 1039.56,-3265.44 985,-3320 985,-3385 1215,-3615 3290,-3615 3465,-3440
  region: 3415,-1945 3415,-2247.59 3217.33,-2405 1205,-2405 1010,-2210 1010,-2095 1040,-2065 3095,-2065 3250,-1910 3380,-1910
  region: 3245,-1090 3410,-925 3410,-635 3375,-600 3245,-600 3090,-755 1055,-755 1030,-780 1030,-900 1220,-1090